# Allegro board pc049a_lemo_db_04.brd
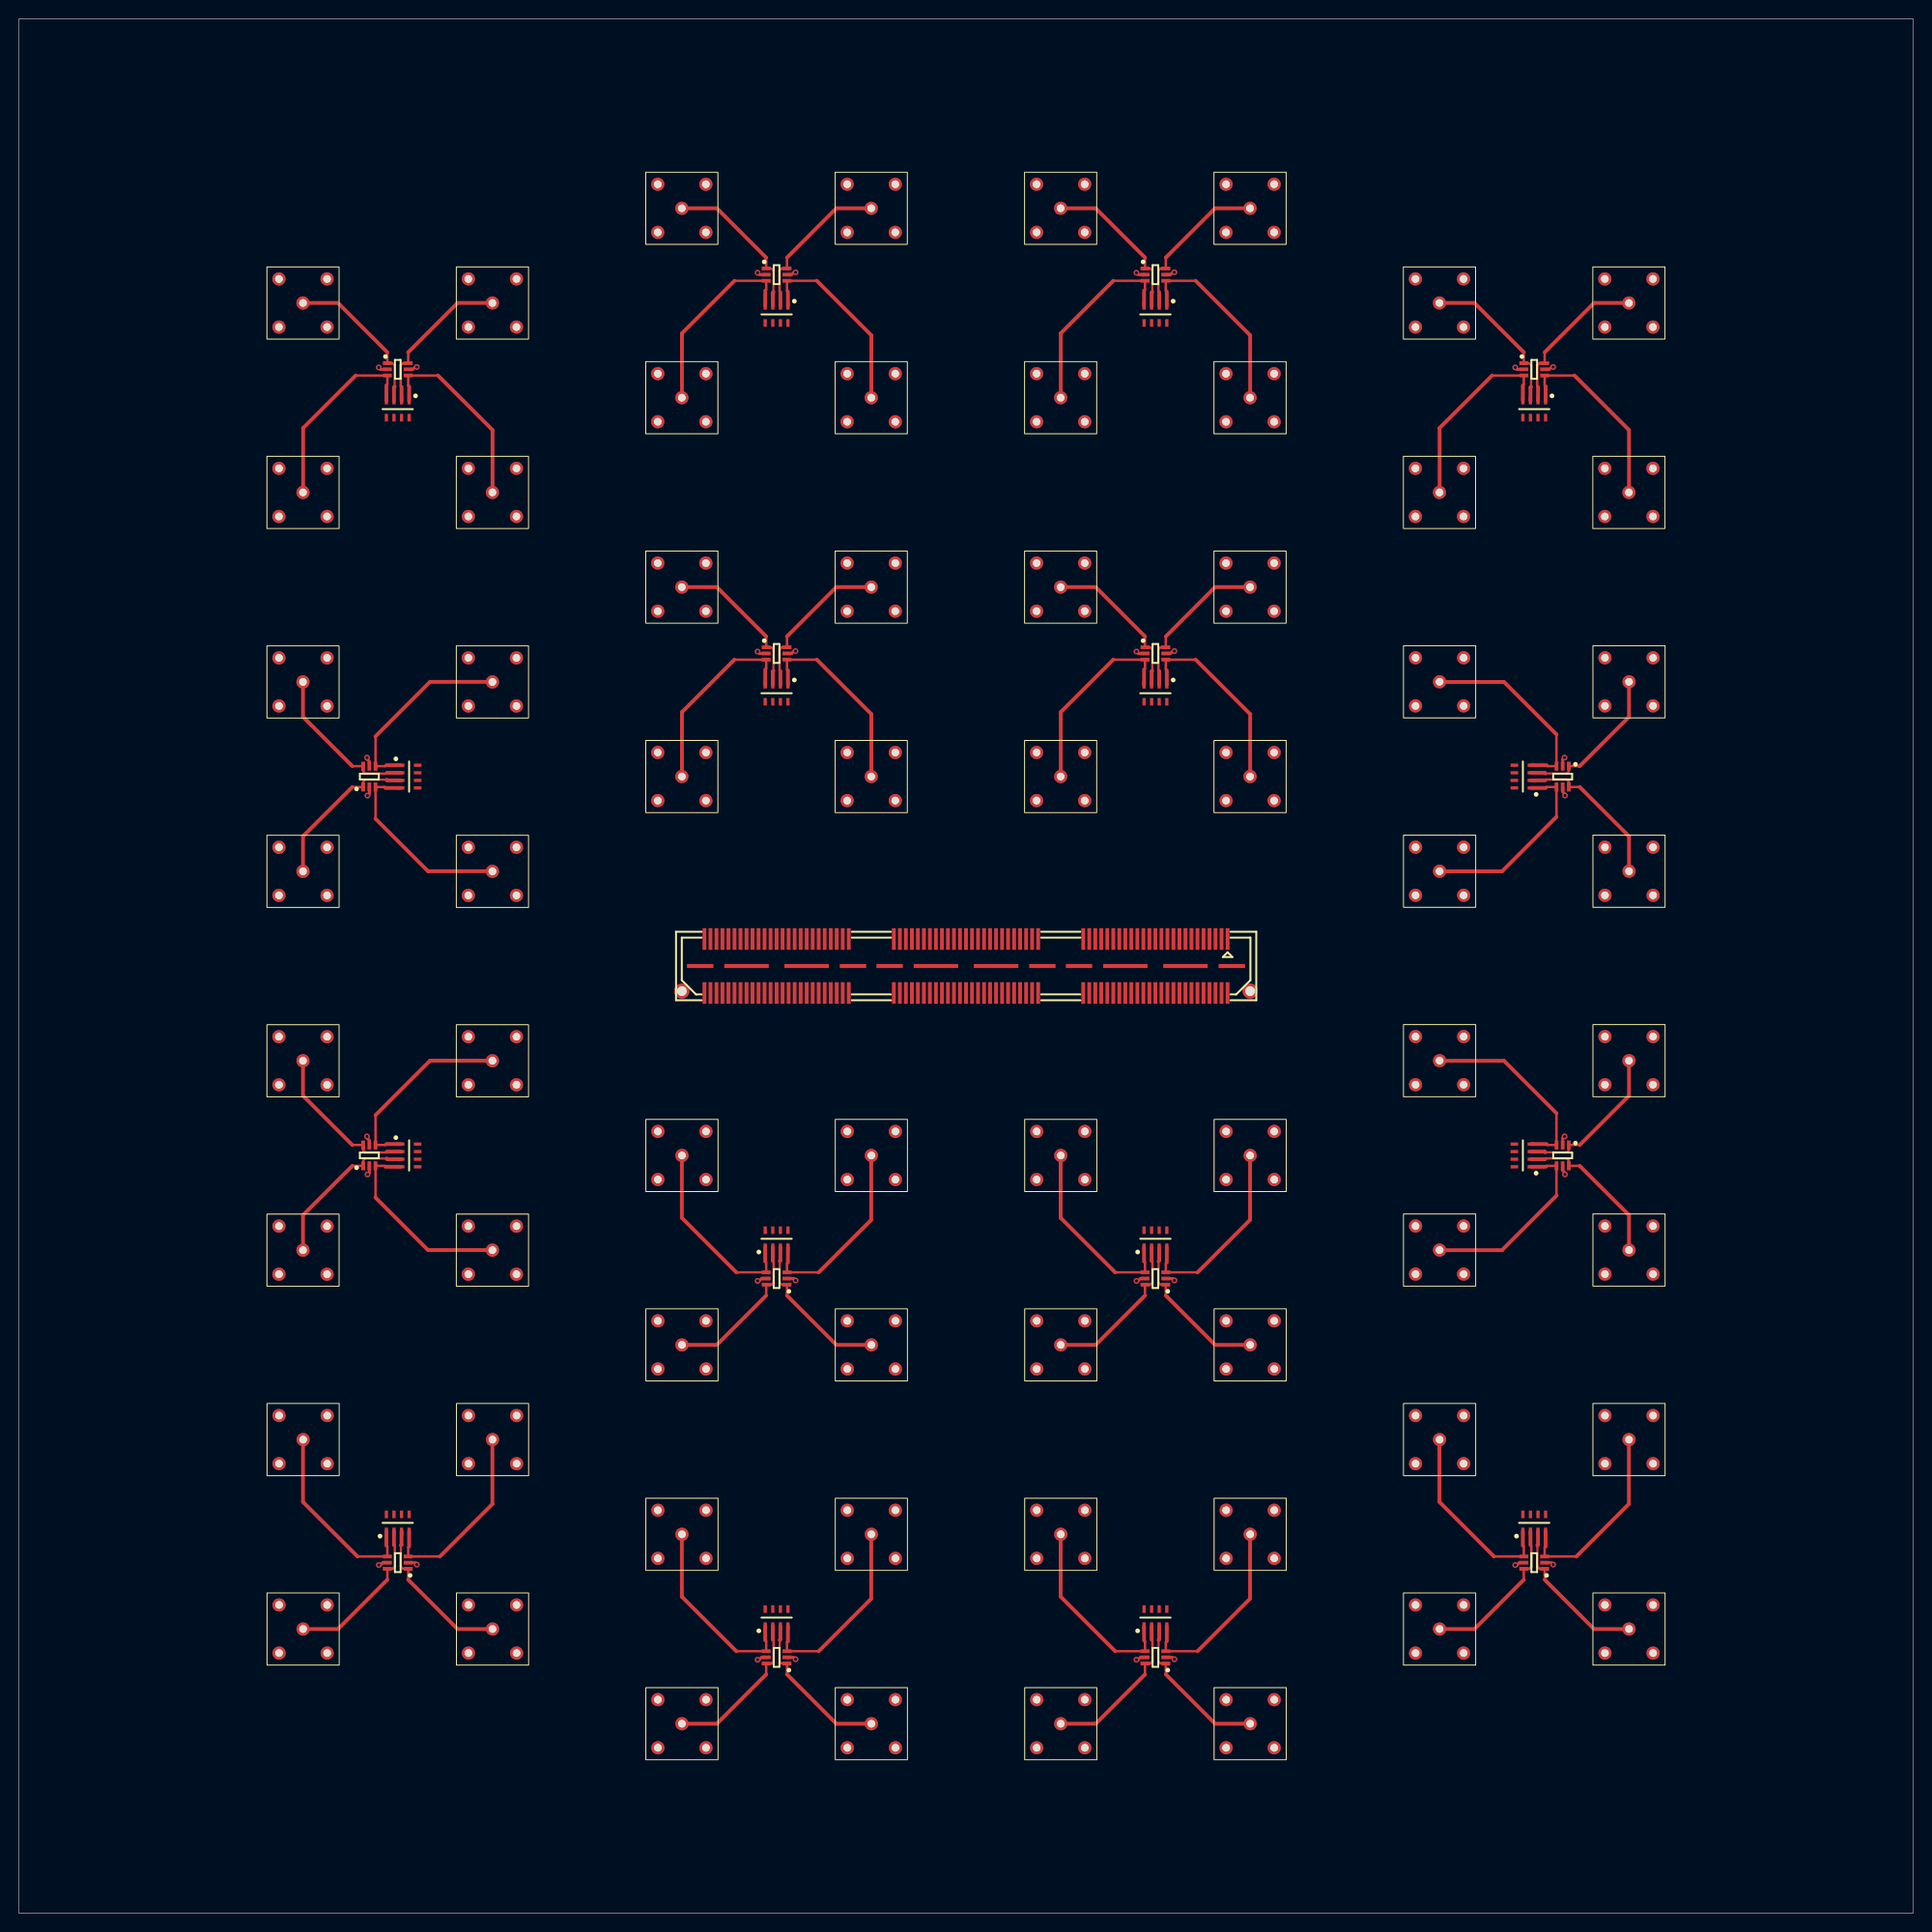
[diagram p0: board, top side]
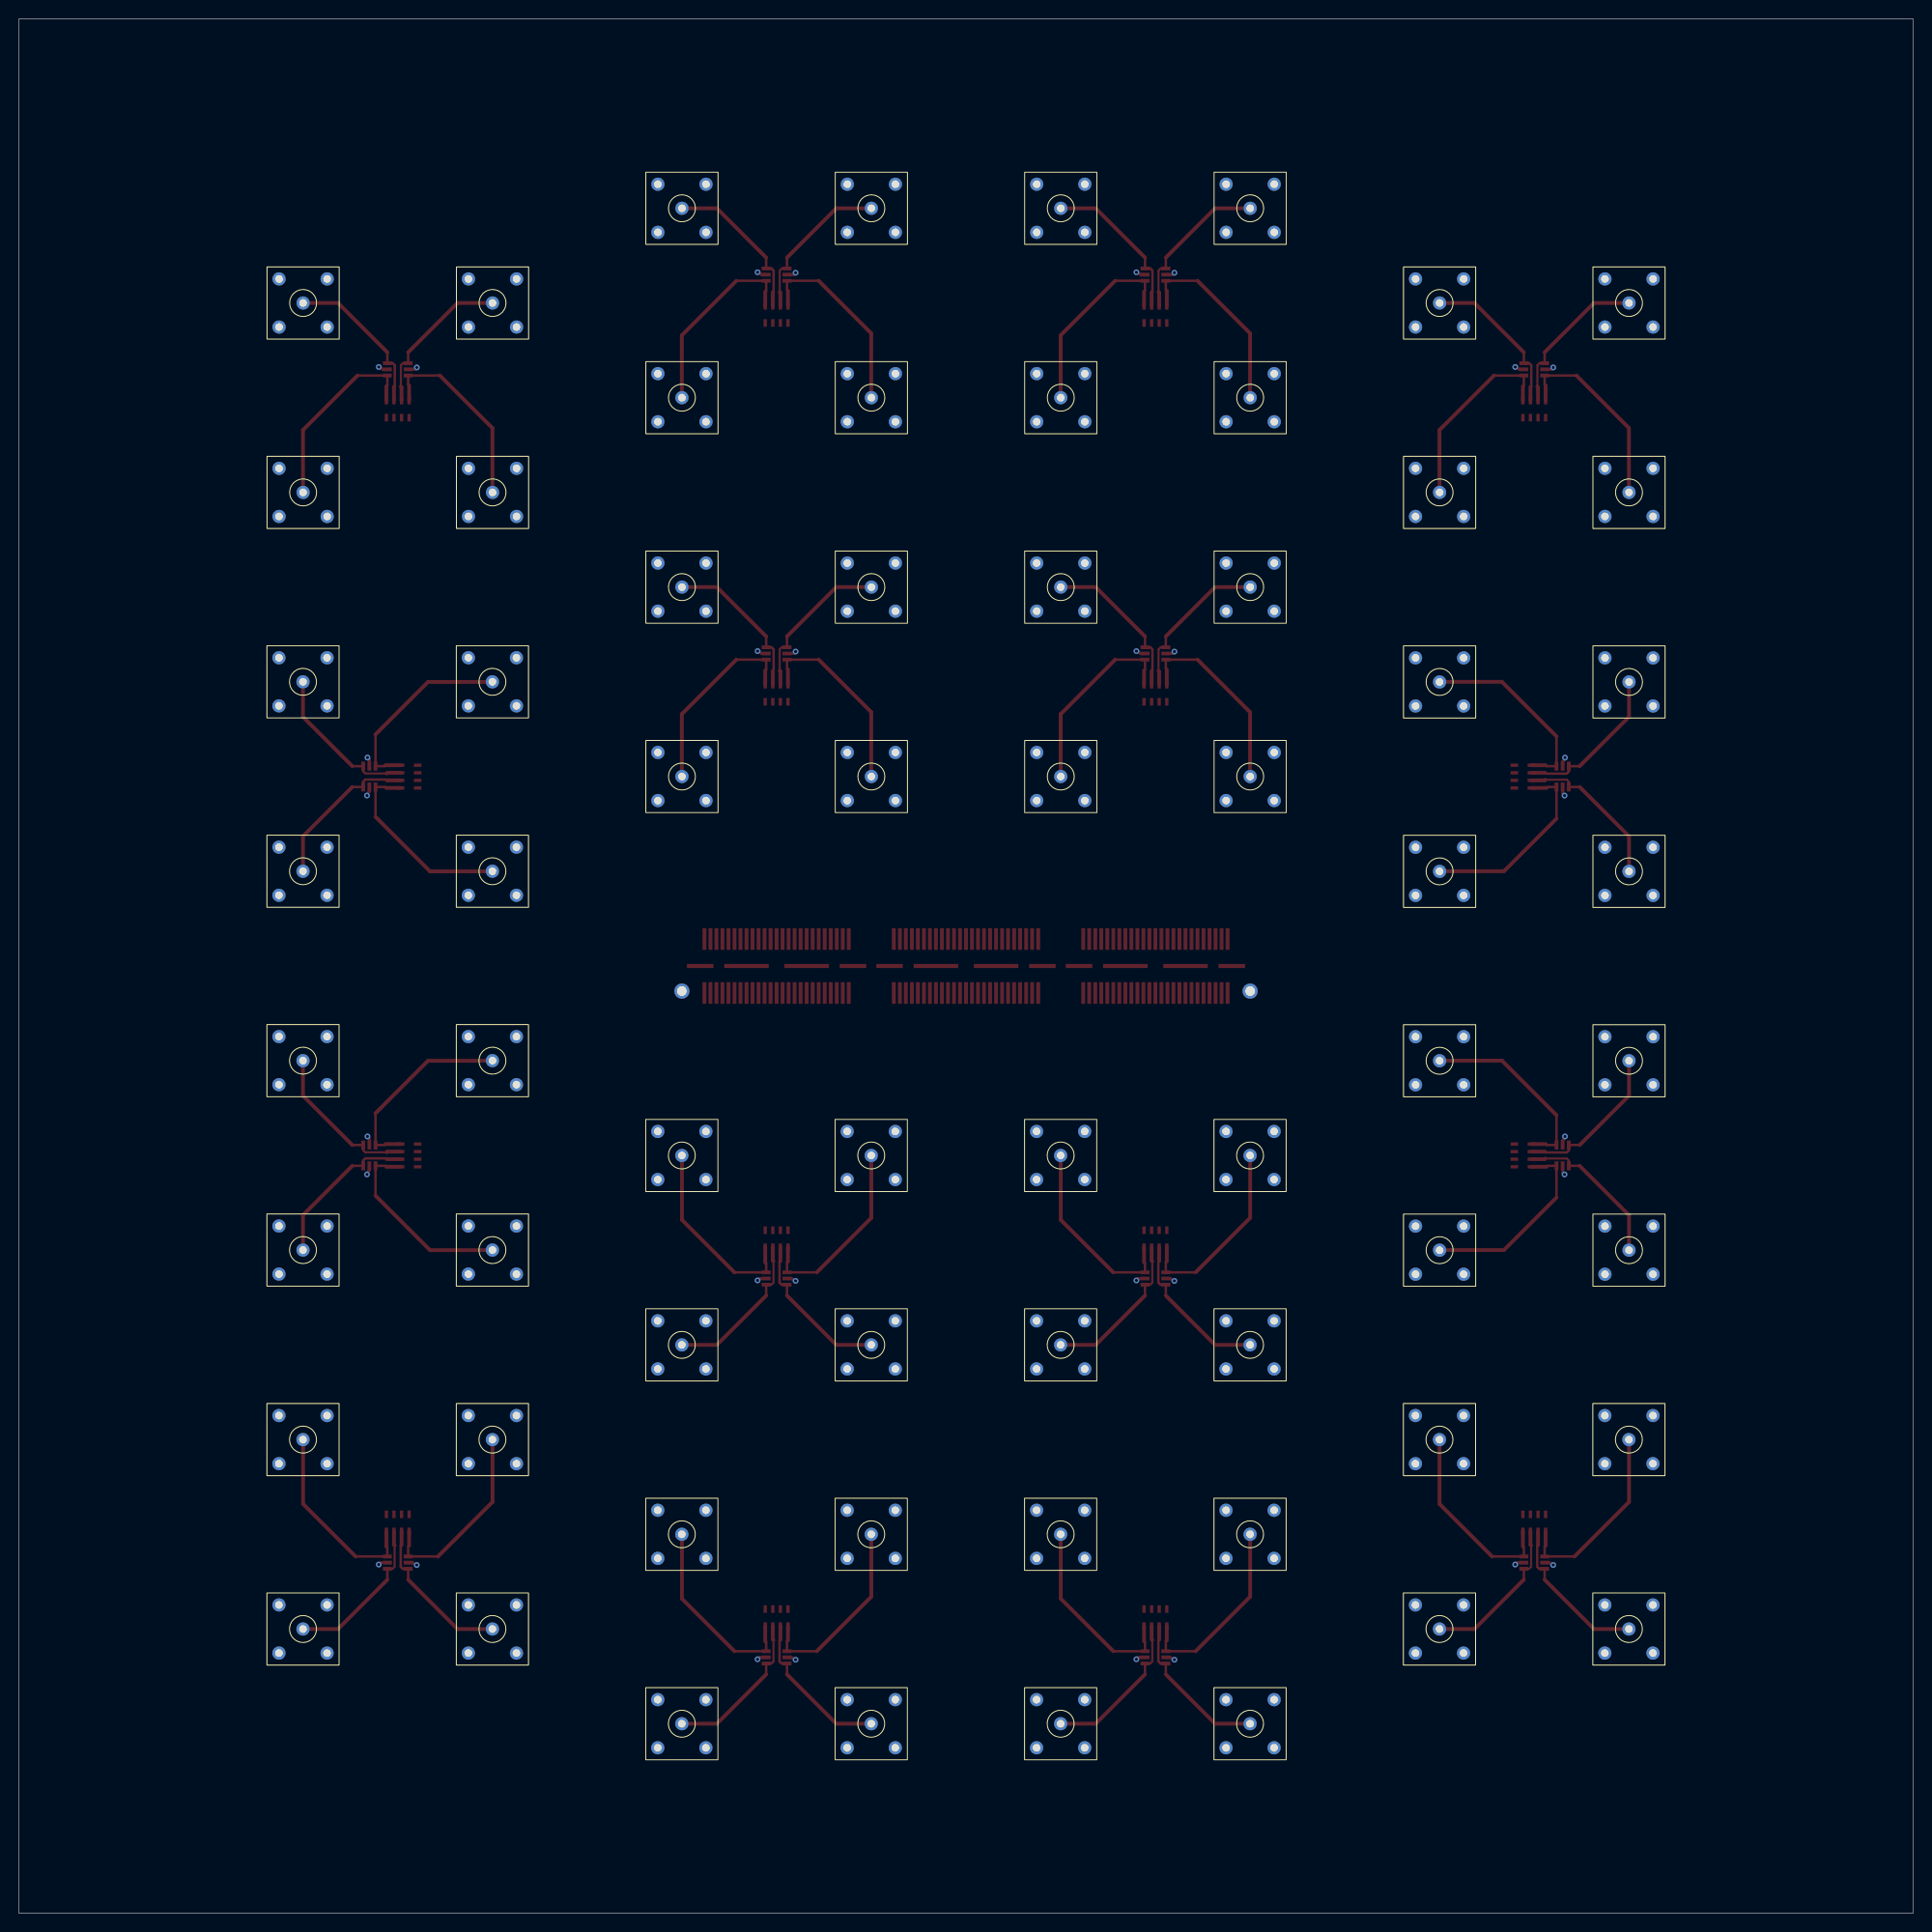
[diagram p1: board, bottom side, seen from below]

Outline 200 x 200 mm; copper layers: TOP, L2, L3, L4, L5, BOTTOM. Coordinates in mm from the lower left corner of the outline.
Outline path: 0,200 200,200 200,0 0,0 0,200

## Design rules (mm)
net group ANALOG_TO_MAROC: nets ANALOG_TO_MAROC<0> ANALOG_TO_MAROC<1> ANALOG_TO_MAROC<2> ANALOG_TO_MAROC<3> ANALOG_TO_MAROC<4> ANALOG_TO_MAROC<5> ANALOG_TO_MAROC<6> ANALOG_TO_MAROC<7> ANALOG_TO_MAROC<8> ANALOG_TO_MAROC<9> ANALOG_TO_MAROC<10> ANALOG_TO_MAROC<11> ANALOG_TO_MAROC<12> ANALOG_TO_MAROC<13> ANALOG_TO_MAROC<14> ANALOG_TO_MAROC<15> ANALOG_TO_MAROC<16> ANALOG_TO_MAROC<17> ANALOG_TO_MAROC<18> ANALOG_TO_MAROC<19> ANALOG_TO_MAROC<20> ANALOG_TO_MAROC<21> ANALOG_TO_MAROC<22> ANALOG_TO_MAROC<23> ANALOG_TO_MAROC<24> ANALOG_TO_MAROC<25> ANALOG_TO_MAROC<26> ANALOG_TO_MAROC<27> ANALOG_TO_MAROC<28> ANALOG_TO_MAROC<29> ANALOG_TO_MAROC<30> ANALOG_TO_MAROC<31> ANALOG_TO_MAROC<32> ANALOG_TO_MAROC<33> ANALOG_TO_MAROC<34> ANALOG_TO_MAROC<35> ANALOG_TO_MAROC<36> ANALOG_TO_MAROC<37> ANALOG_TO_MAROC<38> ANALOG_TO_MAROC<39> ANALOG_TO_MAROC<40> ANALOG_TO_MAROC<41> ANALOG_TO_MAROC<42> ANALOG_TO_MAROC<43> ANALOG_TO_MAROC<44> ANALOG_TO_MAROC<45> ANALOG_TO_MAROC<46> ANALOG_TO_MAROC<47> ANALOG_TO_MAROC<48> ANALOG_TO_MAROC<49> ANALOG_TO_MAROC<50> ANALOG_TO_MAROC<51> ANALOG_TO_MAROC<52> ANALOG_TO_MAROC<53> ANALOG_TO_MAROC<54> ANALOG_TO_MAROC<55> ANALOG_TO_MAROC<56> ANALOG_TO_MAROC<57> ANALOG_TO_MAROC<58> ANALOG_TO_MAROC<59> ANALOG_TO_MAROC<60> ANALOG_TO_MAROC<61> ANALOG_TO_MAROC<62> ANALOG_TO_MAROC<63>

## Placement (name value [footprint] x y rotation side)
CN1_1  100nF/16V  [CAPCAF80P160X320X110-8N]  41.2 80 0 top
CN1_2  100nF/16V  [CAPCAF80P160X320X110-8N]  40 41.2 90 top
CN1_3  100nF/16V  [CAPCAF80P160X320X110-8N]  80 71.2 90 top
CN1_4  100nF/16V  [CAPCAF80P160X320X110-8N]  80 31.2 90 top
CN1_5  100nF/16V  [CAPCAF80P160X320X110-8N]  120 31.2 90 top
CN1_6  100nF/16V  [CAPCAF80P160X320X110-8N]  120 71.2 90 top
CN1_7  100nF/16V  [CAPCAF80P160X320X110-8N]  158.8 80 180 top
CN1_8  100nF/16V  [CAPCAF80P160X320X110-8N]  160 41.2 90 top
CN1_9  100nF/16V  [CAPCAF80P160X320X110-8N]  158.8 120 180 top
CN1_10  100nF/16V  [CAPCAF80P160X320X110-8N]  160 158.8 270 top
CN1_11  100nF/16V  [CAPCAF80P160X320X110-8N]  120 168.8 270 top
CN1_12  100nF/16V  [CAPCAF80P160X320X110-8N]  120 128.8 270 top
CN1_13  100nF/16V  [CAPCAF80P160X320X110-8N]  80 168.8 270 top
CN1_14  100nF/16V  [CAPCAF80P160X320X110-8N]  80 128.8 270 top
CN1_15  100nF/16V  [CAPCAF80P160X320X110-8N]  41.2 120 0 top
CN1_16  100nF/16V  [CAPCAF80P160X320X110-8N]  40 158.8 270 top
D1_1  -  [SOT65P210X110-6N]  37 80 90 top
D1_2  -  [SOT65P210X110-6N]  40 37 180 top
D1_3  -  [SOT65P210X110-6N]  80 67 180 top
D1_4  -  [SOT65P210X110-6N]  80 27 180 top
D1_5  -  [SOT65P210X110-6N]  120 27 180 top
D1_6  -  [SOT65P210X110-6N]  120 67 180 top
D1_7  -  [SOT65P210X110-6N]  163 80 270 top
D1_8  -  [SOT65P210X110-6N]  160 37 180 top
D1_9  -  [SOT65P210X110-6N]  163 120 270 top
D1_10  -  [SOT65P210X110-6N]  160 163 0 top
D1_11  -  [SOT65P210X110-6N]  120 173 0 top
D1_12  -  [SOT65P210X110-6N]  120 133 0 top
D1_13  -  [SOT65P210X110-6N]  80 173 0 top
D1_14  -  [SOT65P210X110-6N]  80 133 0 top
D1_15  -  [SOT65P210X110-6N]  37 120 90 top
D1_16  -  [SOT65P210X110-6N]  40 163 0 top
J1  -  [CON150_QSSDA]  127.62 102.85 270 top
NOREF  -  []  -120 -120 0 top
PX1_1  -  [PLEMOD80]  50 70 270 bottom
PX1_2  -  [PLEMOD80]  50 50 0 bottom
PX1_3  -  [PLEMOD80]  90 80 0 bottom
PX1_4  -  [PLEMOD80]  90 40 0 bottom
PX1_5  -  [PLEMOD80]  130 40 0 bottom
PX1_6  -  [PLEMOD80]  130 80 0 bottom
PX1_7  -  [PLEMOD80]  150 90 90 bottom
PX1_8  -  [PLEMOD80]  170 50 0 bottom
PX1_9  -  [PLEMOD80]  150 130 90 bottom
PX1_10  -  [PLEMOD80]  150 150 180 bottom
PX1_11  -  [PLEMOD80]  110 160 180 bottom
PX1_12  -  [PLEMOD80]  110 120 180 bottom
PX1_13  -  [PLEMOD80]  70 160 180 bottom
PX1_14  -  [PLEMOD80]  70 120 180 bottom
PX1_15  -  [PLEMOD80]  50 110 270 bottom
PX1_16  -  [PLEMOD80]  30 150 180 bottom
PX2_1  -  [PLEMOD80]  30 70 270 bottom
PX2_2  -  [PLEMOD80]  50 30 0 bottom
PX2_3  -  [PLEMOD80]  90 60 0 bottom
PX2_4  -  [PLEMOD80]  90 20 0 bottom
PX2_5  -  [PLEMOD80]  130 20 0 bottom
PX2_6  -  [PLEMOD80]  130 60 0 bottom
PX2_7  -  [PLEMOD80]  170 90 90 bottom
PX2_8  -  [PLEMOD80]  170 30 0 bottom
PX2_9  -  [PLEMOD80]  170 130 90 bottom
PX2_10  -  [PLEMOD80]  150 170 180 bottom
PX2_11  -  [PLEMOD80]  110 180 180 bottom
PX2_12  -  [PLEMOD80]  110 140 180 bottom
PX2_13  -  [PLEMOD80]  70 180 180 bottom
PX2_14  -  [PLEMOD80]  70 140 180 bottom
PX2_15  -  [PLEMOD80]  30 110 270 bottom
PX2_16  -  [PLEMOD80]  30 170 180 bottom
PX3_1  -  [PLEMOD80]  30 90 270 bottom
PX3_2  -  [PLEMOD80]  30 30 0 bottom
PX3_3  -  [PLEMOD80]  70 60 0 bottom
PX3_4  -  [PLEMOD80]  70 20 0 bottom
PX3_5  -  [PLEMOD80]  110 20 0 bottom
PX3_6  -  [PLEMOD80]  110 60 0 bottom
PX3_7  -  [PLEMOD80]  170 70 90 bottom
PX3_8  -  [PLEMOD80]  150 30 0 bottom
PX3_9  -  [PLEMOD80]  170 110 90 bottom
PX3_10  -  [PLEMOD80]  170 170 180 bottom
PX3_11  -  [PLEMOD80]  130 180 180 bottom
PX3_12  -  [PLEMOD80]  130 140 180 bottom
PX3_13  -  [PLEMOD80]  90 180 180 bottom
PX3_14  -  [PLEMOD80]  90 140 180 bottom
PX3_15  -  [PLEMOD80]  30 130 270 bottom
PX3_16  -  [PLEMOD80]  50 170 180 bottom
PX4_1  -  [PLEMOD80]  50 90 270 bottom
PX4_2  -  [PLEMOD80]  30 50 0 bottom
PX4_3  -  [PLEMOD80]  70 80 0 bottom
PX4_4  -  [PLEMOD80]  70 40 0 bottom
PX4_5  -  [PLEMOD80]  110 40 0 bottom
PX4_6  -  [PLEMOD80]  110 80 0 bottom
PX4_7  -  [PLEMOD80]  150 70 90 bottom
PX4_8  -  [PLEMOD80]  150 50 0 bottom
PX4_9  -  [PLEMOD80]  150 110 90 bottom
PX4_10  -  [PLEMOD80]  170 150 180 bottom
PX4_11  -  [PLEMOD80]  130 160 180 bottom
PX4_12  -  [PLEMOD80]  130 120 180 bottom
PX4_13  -  [PLEMOD80]  90 160 180 bottom
PX4_14  -  [PLEMOD80]  90 120 180 bottom
PX4_15  -  [PLEMOD80]  50 130 270 bottom
PX4_16  -  [PLEMOD80]  50 150 180 bottom

## Library data of the parts
CN1_1-CN1_16 = CAPN4I: part number: CAPN4I-100NF,16V,X7R,CKCA43
D1_1-D1_16 = PRTR5V0U4Y
J1 = CON150P: part number: CON150P-QSS75_01FDA
PX1_1-PX1_16 PX2_1-PX2_16 PX3_1-PX3_16 PX4_1-PX4_16 = COAX: part number: COAX-PLEMO00D

## Footprints (pads in the part's own frame, mm; a bottom-side part is the same pattern mirrored in y, then rotated)
CAPCAF80P160X320X110-8N
  rect 0.8x0.35 smd: 1(-0.9,1.2) 2(0.9,1.2) 3(-0.9,0.4) 4(0.9,0.4) 5(-0.9,-0.4) 6(0.9,-0.4) 7(-0.9,-1.2) 8(0.9,-1.2)
CON150_QSSDA
  round 1.6 hole 1.016: (5.5,2.38) (5.5,-57.62)
  rect 2.286x0.406 smd: 1(0,0) 2(5.7,0) 3(0,-0.635) 4(5.7,-0.635) 5(0,-1.27) 6(5.7,-1.27) 7(0,-1.905) 8(5.7,-1.905) 9(0,-2.54) 10(5.7,-2.54) 11(0,-3.175) 12(5.7,-3.175) 13(0,-3.81) 14(5.7,-3.81) 15(0,-4.445) 16(5.7,-4.445) 17(0,-5.08) 18(5.7,-5.08) 19(0,-5.715) 20(5.7,-5.715) 21(0,-6.35) 22(5.7,-6.35) 23(0,-6.985) 24(5.7,-6.985) 25(0,-7.62) 26(5.7,-7.62) 27(0,-8.255) 28(5.7,-8.255) 29(0,-8.89) 30(5.7,-8.89) 31(0,-9.525) 32(5.7,-9.525) 33(0,-10.16) 34(5.7,-10.16) 35(0,-10.795) 36(5.7,-10.795) 37(0,-11.43) 38(5.7,-11.43) 39(0,-12.065) 40(5.7,-12.065) 41(0,-12.7) 42(5.7,-12.7) 43(0,-13.335) 44(5.7,-13.335) 45(0,-13.97) 46(5.7,-13.97) 47(0,-14.605) 48(5.7,-14.605) 49(0,-15.24) 50(5.7,-15.24) 51(0,-20) 52(5.7,-20) 53(0,-20.635) 54(5.7,-20.635) 55(0,-21.27) 56(5.7,-21.27) 57(0,-21.905) 58(5.7,-21.905) 59(0,-22.54) 60(5.7,-22.54) 61(0,-23.175) 62(5.7,-23.175) 63(0,-23.81) 64(5.7,-23.81) 65(0,-24.445) 66(5.7,-24.445) 67(0,-25.08) 68(5.7,-25.08) 69(0,-25.715) 70(5.7,-25.715) 71(0,-26.35) 72(5.7,-26.35) 73(0,-26.985) 74(5.7,-26.985) 75(0,-27.62) 76(5.7,-27.62) 77(0,-28.255) 78(5.7,-28.255) 79(0,-28.89) 80(5.7,-28.89) 81(0,-29.525) 82(5.7,-29.525) 83(0,-30.16) 84(5.7,-30.16) 85(0,-30.795) 86(5.7,-30.795) 87(0,-31.43) 88(5.7,-31.43) 89(0,-32.065) 90(5.7,-32.065) 91(0,-32.7) 92(5.7,-32.7) 93(0,-33.335) 94(5.7,-33.335) 95(0,-33.97) 96(5.7,-33.97) 97(0,-34.605) 98(5.7,-34.605) 99(0,-35.24) 100(5.7,-35.24) 101(0,-40) 102(5.7,-40) 103(0,-40.635) 104(5.7,-40.635) 105(0,-41.27) 106(5.7,-41.27) 107(0,-41.905) 108(5.7,-41.905) 109(0,-42.54) 110(5.7,-42.54) 111(0,-43.175) 112(5.7,-43.175) 113(0,-43.81) 114(5.7,-43.81) 115(0,-44.445) 116(5.7,-44.445) 117(0,-45.08) 118(5.7,-45.08) 119(0,-45.715) 120(5.7,-45.715) 121(0,-46.35) 122(5.7,-46.35) 123(0,-46.985) 124(5.7,-46.985) 125(0,-47.62) 126(5.7,-47.62) 127(0,-48.255) 128(5.7,-48.255) 129(0,-48.89) 130(5.7,-48.89) 131(0,-49.525) 132(5.7,-49.525) 133(0,-50.16) 134(5.7,-50.16) 135(0,-50.795) 136(5.7,-50.795) 137(0,-51.43) 138(5.7,-51.43) 139(0,-52.065) 140(5.7,-52.065) 141(0,-52.7) 142(5.7,-52.7) 143(0,-53.335) 144(5.7,-53.335) 145(0,-53.97) 146(5.7,-53.97) 147(0,-54.605) 148(5.7,-54.605) 149(0,-55.24) 150(5.7,-55.24)
  rect 0.432x2.794 smd: 151(2.85,0.445) 154(2.85,-15.685) 155(2.85,-19.555) 158(2.85,-35.685) 159(2.85,-39.555) 162(2.85,-55.685)
  rect 0.432x4.699 smd: 152(2.85,-4.445) 153(2.85,-10.795) 156(2.85,-24.445) 157(2.85,-30.795) 160(2.85,-44.445) 161(2.85,-50.795)
PLEMOD80
  round 1.397 hole 0.813: 1(0.006,0.007) 2(-2.534,-2.533) 3(2.546,-2.533) 4(2.546,2.547) 5(-2.534,2.547)
SOT65P210X110-6N
  rect 0.95x0.4 smd: 1(-1.1,0.65) 2(-1.1,0) 3(-1.1,-0.65) 4(1.1,-0.65) 5(1.1,0) 6(1.1,0.65)

## Nets
AVDD: J1.147(A<146>) J1.148(A<147>) J1.149(A<148>) J1.150(A<149>)
GND_SIGNAL: D1_1.2(GND) D1_1.5(VCC) D1_2.2(GND) D1_2.5(VCC) D1_3.2(GND) D1_3.5(VCC) D1_4.2(GND) D1_4.5(VCC) D1_5.2(GND) D1_5.5(VCC) D1_6.2(GND) D1_6.5(VCC) D1_7.2(GND) D1_7.5(VCC) D1_8.2(GND) D1_8.5(VCC) D1_9.2(GND) D1_9.5(VCC) D1_10.2(GND) D1_10.5(VCC) D1_11.2(GND) D1_11.5(VCC) D1_12.2(GND) D1_12.5(VCC) D1_13.2(GND) D1_13.5(VCC) D1_14.2(GND) D1_14.5(VCC) D1_15.2(GND) D1_15.5(VCC) D1_16.2(GND) D1_16.5(VCC) J1.1(A<0>) J1.4(A<3>) J1.5(A<4>) J1.8(A<7>) J1.9(A<8>) J1.12(A<11>) J1.13(A<12>) J1.16(A<15>) J1.17(A<16>) J1.20(A<19>) J1.21(A<20>) J1.24(A<23>) J1.25(A<24>) J1.28(A<27>) J1.29(A<28>) J1.32(A<31>) J1.33(A<32>) J1.36(A<35>) J1.37(A<36>) J1.40(A<39>) J1.41(A<40>) J1.44(A<43>) J1.45(A<44>) J1.48(A<47>) J1.49(A<48>) J1.52(A<51>) J1.53(A<52>) J1.56(A<55>) J1.57(A<56>) J1.60(A<59>) J1.61(A<60>) J1.64(A<63>) J1.65(A<64>) J1.68(A<67>) J1.69(A<68>) J1.72(A<71>) J1.73(A<72>) J1.76(A<75>) J1.77(A<76>) J1.80(A<79>) J1.81(A<80>) J1.84(A<83>) J1.85(A<84>) J1.88(A<87>) J1.89(A<88>) J1.92(A<91>) J1.93(A<92>) J1.96(A<95>) J1.97(A<96>) J1.100(A<99>) J1.101(A<100>) J1.104(A<103>) J1.105(A<104>) J1.108(A<107>) J1.109(A<108>) J1.112(A<111>) J1.113(A<112>) J1.116(A<115>) J1.117(A<116>) J1.120(A<119>) J1.121(A<120>) J1.124(A<123>) J1.125(A<124>) J1.128(A<127>) J1.129(A<128>) J1.132(A<131>) J1.133(A<132>) J1.136(A<135>) J1.137(A<136>) J1.140(A<139>) J1.141(A<140>) J1.144(A<143>) J1.145(A<144>) J1.146(A<145>) PX1_1.2(B<0>) PX1_1.3(B<1>) PX1_1.4(B<2>) PX1_1.5(B<3>) PX1_2.2(B<0>) PX1_2.3(B<1>) PX1_2.4(B<2>) PX1_2.5(B<3>) PX1_3.2(B<0>) PX1_3.3(B<1>) PX1_3.4(B<2>) PX1_3.5(B<3>) PX1_4.2(B<0>) PX1_4.3(B<1>) PX1_4.4(B<2>) PX1_4.5(B<3>) PX1_5.2(B<0>) PX1_5.3(B<1>) PX1_5.4(B<2>) PX1_5.5(B<3>) PX1_6.2(B<0>) PX1_6.3(B<1>) PX1_6.4(B<2>) PX1_6.5(B<3>) PX1_7.2(B<0>) PX1_7.3(B<1>) PX1_7.4(B<2>) PX1_7.5(B<3>) PX1_8.2(B<0>) PX1_8.3(B<1>) PX1_8.4(B<2>) PX1_8.5(B<3>) PX1_9.2(B<0>) PX1_9.3(B<1>) PX1_9.4(B<2>) PX1_9.5(B<3>) PX1_10.2(B<0>) PX1_10.3(B<1>) PX1_10.4(B<2>) PX1_10.5(B<3>) PX1_11.2(B<0>) PX1_11.3(B<1>) PX1_11.4(B<2>) PX1_11.5(B<3>) PX1_12.2(B<0>) PX1_12.3(B<1>) PX1_12.4(B<2>) PX1_12.5(B<3>) PX1_13.2(B<0>) PX1_13.3(B<1>) PX1_13.4(B<2>) PX1_13.5(B<3>) PX1_14.2(B<0>) PX1_14.3(B<1>) PX1_14.4(B<2>) PX1_14.5(B<3>) PX1_15.2(B<0>) PX1_15.3(B<1>) PX1_15.4(B<2>) PX1_15.5(B<3>) PX1_16.2(B<0>) PX1_16.3(B<1>) PX1_16.4(B<2>) PX1_16.5(B<3>) PX2_1.2(B<0>) PX2_1.3(B<1>) PX2_1.4(B<2>) PX2_1.5(B<3>) PX2_2.2(B<0>) PX2_2.3(B<1>) PX2_2.4(B<2>) PX2_2.5(B<3>) PX2_3.2(B<0>) PX2_3.3(B<1>) PX2_3.4(B<2>) PX2_3.5(B<3>) PX2_4.2(B<0>) PX2_4.3(B<1>) PX2_4.4(B<2>) PX2_4.5(B<3>) PX2_5.2(B<0>) PX2_5.3(B<1>) PX2_5.4(B<2>) PX2_5.5(B<3>) PX2_6.2(B<0>) PX2_6.3(B<1>) PX2_6.4(B<2>) PX2_6.5(B<3>) PX2_7.2(B<0>) PX2_7.3(B<1>) PX2_7.4(B<2>) PX2_7.5(B<3>) PX2_8.2(B<0>) PX2_8.3(B<1>) PX2_8.4(B<2>) PX2_8.5(B<3>) PX2_9.2(B<0>) PX2_9.3(B<1>) PX2_9.4(B<2>) PX2_9.5(B<3>) PX2_10.2(B<0>) PX2_10.3(B<1>) PX2_10.4(B<2>) PX2_10.5(B<3>) PX2_11.2(B<0>) PX2_11.3(B<1>) PX2_11.4(B<2>) PX2_11.5(B<3>) PX2_12.2(B<0>) PX2_12.3(B<1>) PX2_12.4(B<2>) PX2_12.5(B<3>) PX2_13.2(B<0>) PX2_13.3(B<1>) PX2_13.4(B<2>) PX2_13.5(B<3>) PX2_14.2(B<0>) PX2_14.3(B<1>) PX2_14.4(B<2>) PX2_14.5(B<3>) PX2_15.2(B<0>) PX2_15.3(B<1>) PX2_15.4(B<2>) PX2_15.5(B<3>) PX2_16.2(B<0>) PX2_16.3(B<1>) PX2_16.4(B<2>) PX2_16.5(B<3>) PX3_1.2(B<0>) PX3_1.3(B<1>) PX3_1.4(B<2>) PX3_1.5(B<3>) PX3_2.2(B<0>) PX3_2.3(B<1>) PX3_2.4(B<2>) PX3_2.5(B<3>) PX3_3.2(B<0>) PX3_3.3(B<1>) PX3_3.4(B<2>) PX3_3.5(B<3>) PX3_4.2(B<0>) PX3_4.3(B<1>) PX3_4.4(B<2>) PX3_4.5(B<3>) PX3_5.2(B<0>) PX3_5.3(B<1>) PX3_5.4(B<2>) PX3_5.5(B<3>) PX3_6.2(B<0>) PX3_6.3(B<1>) PX3_6.4(B<2>) PX3_6.5(B<3>) PX3_7.2(B<0>) PX3_7.3(B<1>) PX3_7.4(B<2>) PX3_7.5(B<3>) PX3_8.2(B<0>) PX3_8.3(B<1>) PX3_8.4(B<2>) PX3_8.5(B<3>) PX3_9.2(B<0>) PX3_9.3(B<1>) PX3_9.4(B<2>) PX3_9.5(B<3>) PX3_10.2(B<0>) PX3_10.3(B<1>) PX3_10.4(B<2>) PX3_10.5(B<3>) PX3_11.2(B<0>) PX3_11.3(B<1>) PX3_11.4(B<2>) PX3_11.5(B<3>) PX3_12.2(B<0>) PX3_12.3(B<1>) PX3_12.4(B<2>) PX3_12.5(B<3>) PX3_13.2(B<0>) PX3_13.3(B<1>) PX3_13.4(B<2>) PX3_13.5(B<3>) PX3_14.2(B<0>) PX3_14.3(B<1>) PX3_14.4(B<2>) PX3_14.5(B<3>) PX3_15.2(B<0>) PX3_15.3(B<1>) PX3_15.4(B<2>) PX3_15.5(B<3>) PX3_16.2(B<0>) PX3_16.3(B<1>) PX3_16.4(B<2>) PX3_16.5(B<3>) PX4_1.2(B<0>) PX4_1.3(B<1>) PX4_1.4(B<2>) PX4_1.5(B<3>) PX4_2.2(B<0>) PX4_2.3(B<1>) PX4_2.4(B<2>) PX4_2.5(B<3>) PX4_3.2(B<0>) PX4_3.3(B<1>) PX4_3.4(B<2>) PX4_3.5(B<3>) PX4_4.2(B<0>) PX4_4.3(B<1>) PX4_4.4(B<2>) PX4_4.5(B<3>) PX4_5.2(B<0>) PX4_5.3(B<1>) PX4_5.4(B<2>) PX4_5.5(B<3>) PX4_6.2(B<0>) PX4_6.3(B<1>) PX4_6.4(B<2>) PX4_6.5(B<3>) PX4_7.2(B<0>) PX4_7.3(B<1>) PX4_7.4(B<2>) PX4_7.5(B<3>) PX4_8.2(B<0>) PX4_8.3(B<1>) PX4_8.4(B<2>) PX4_8.5(B<3>) PX4_9.2(B<0>) PX4_9.3(B<1>) PX4_9.4(B<2>) PX4_9.5(B<3>) PX4_10.2(B<0>) PX4_10.3(B<1>) PX4_10.4(B<2>) PX4_10.5(B<3>) PX4_11.2(B<0>) PX4_11.3(B<1>) PX4_11.4(B<2>) PX4_11.5(B<3>) PX4_12.2(B<0>) PX4_12.3(B<1>) PX4_12.4(B<2>) PX4_12.5(B<3>) PX4_13.2(B<0>) PX4_13.3(B<1>) PX4_13.4(B<2>) PX4_13.5(B<3>) PX4_14.2(B<0>) PX4_14.3(B<1>) PX4_14.4(B<2>) PX4_14.5(B<3>) PX4_15.2(B<0>) PX4_15.3(B<1>) PX4_15.4(B<2>) PX4_15.5(B<3>) PX4_16.2(B<0>) PX4_16.3(B<1>) PX4_16.4(B<2>) PX4_16.5(B<3>)
ANALOG_TO_MAROC<0>: CN1_7.8(B<0>) J1.2(A<1>)
ANALOG_TO_MAROC<1>: CN1_9.2(B<0>) J1.3(A<2>)
ANALOG_TO_MAROC<2>: CN1_7.6(B<0>) J1.6(A<5>)
ANALOG_TO_MAROC<3>: CN1_9.4(B<0>) J1.7(A<6>)
ANALOG_TO_MAROC<4>: CN1_7.4(B<0>) J1.10(A<9>)
ANALOG_TO_MAROC<5>: CN1_9.6(B<0>) J1.11(A<10>)
ANALOG_TO_MAROC<6>: CN1_7.2(B<0>) J1.14(A<13>)
ANALOG_TO_MAROC<7>: CN1_9.8(B<0>) J1.15(A<14>)
ANALOG_TO_MAROC<8>: CN1_8.8(B<0>) J1.18(A<17>)
ANALOG_TO_MAROC<9>: CN1_10.2(B<0>) J1.19(A<18>)
ANALOG_TO_MAROC<10>: CN1_8.6(B<0>) J1.22(A<21>)
ANALOG_TO_MAROC<11>: CN1_10.4(B<0>) J1.23(A<22>)
ANALOG_TO_MAROC<12>: CN1_8.4(B<0>) J1.26(A<25>)
ANALOG_TO_MAROC<13>: CN1_10.6(B<0>) J1.27(A<26>)
ANALOG_TO_MAROC<14>: CN1_8.2(B<0>) J1.30(A<29>)
ANALOG_TO_MAROC<15>: CN1_10.8(B<0>) J1.31(A<30>)
ANALOG_TO_MAROC<16>: CN1_6.8(B<0>) J1.34(A<33>)
ANALOG_TO_MAROC<17>: CN1_12.2(B<0>) J1.35(A<34>)
ANALOG_TO_MAROC<18>: CN1_6.6(B<0>) J1.38(A<37>)
ANALOG_TO_MAROC<19>: CN1_12.4(B<0>) J1.39(A<38>)
ANALOG_TO_MAROC<20>: CN1_6.4(B<0>) J1.42(A<41>)
ANALOG_TO_MAROC<21>: CN1_12.6(B<0>) J1.43(A<42>)
ANALOG_TO_MAROC<22>: CN1_6.2(B<0>) J1.46(A<45>)
ANALOG_TO_MAROC<23>: CN1_12.8(B<0>) J1.47(A<46>)
ANALOG_TO_MAROC<24>: CN1_5.8(B<0>) J1.50(A<49>)
ANALOG_TO_MAROC<25>: CN1_11.2(B<0>) J1.51(A<50>)
ANALOG_TO_MAROC<26>: CN1_5.6(B<0>) J1.54(A<53>)
ANALOG_TO_MAROC<27>: CN1_11.4(B<0>) J1.55(A<54>)
ANALOG_TO_MAROC<28>: CN1_5.4(B<0>) J1.58(A<57>)
ANALOG_TO_MAROC<29>: CN1_11.6(B<0>) J1.59(A<58>)
ANALOG_TO_MAROC<30>: CN1_5.2(B<0>) J1.62(A<61>)
ANALOG_TO_MAROC<31>: CN1_11.8(B<0>) J1.63(A<62>)
ANALOG_TO_MAROC<32>: CN1_4.8(B<0>) J1.66(A<65>)
ANALOG_TO_MAROC<33>: CN1_13.2(B<0>) J1.67(A<66>)
ANALOG_TO_MAROC<34>: CN1_4.6(B<0>) J1.70(A<69>)
ANALOG_TO_MAROC<35>: CN1_13.4(B<0>) J1.71(A<70>)
ANALOG_TO_MAROC<36>: CN1_4.4(B<0>) J1.74(A<73>)
ANALOG_TO_MAROC<37>: CN1_13.6(B<0>) J1.75(A<74>)
ANALOG_TO_MAROC<38>: CN1_4.2(B<0>) J1.78(A<77>)
ANALOG_TO_MAROC<39>: CN1_13.8(B<0>) J1.79(A<78>)
ANALOG_TO_MAROC<40>: CN1_3.8(B<0>) J1.82(A<81>)
ANALOG_TO_MAROC<41>: CN1_14.2(B<0>) J1.83(A<82>)
ANALOG_TO_MAROC<42>: CN1_3.6(B<0>) J1.86(A<85>)
ANALOG_TO_MAROC<43>: CN1_14.4(B<0>) J1.87(A<86>)
ANALOG_TO_MAROC<44>: CN1_3.4(B<0>) J1.90(A<89>)
ANALOG_TO_MAROC<45>: CN1_14.6(B<0>) J1.91(A<90>)
ANALOG_TO_MAROC<46>: CN1_3.2(B<0>) J1.94(A<93>)
ANALOG_TO_MAROC<47>: CN1_14.8(B<0>) J1.95(A<94>)
ANALOG_TO_MAROC<48>: CN1_2.8(B<0>) J1.98(A<97>)
ANALOG_TO_MAROC<49>: CN1_16.2(B<0>) J1.99(A<98>)
ANALOG_TO_MAROC<50>: CN1_2.6(B<0>) J1.102(A<101>)
ANALOG_TO_MAROC<51>: CN1_16.4(B<0>) J1.103(A<102>)
ANALOG_TO_MAROC<52>: CN1_2.4(B<0>) J1.106(A<105>)
ANALOG_TO_MAROC<53>: CN1_16.6(B<0>) J1.107(A<106>)
ANALOG_TO_MAROC<54>: CN1_2.2(B<0>) J1.110(A<109>)
ANALOG_TO_MAROC<55>: CN1_16.8(B<0>) J1.111(A<110>)
ANALOG_TO_MAROC<56>: CN1_1.8(B<0>) J1.114(A<113>)
ANALOG_TO_MAROC<57>: CN1_15.2(B<0>) J1.115(A<114>)
ANALOG_TO_MAROC<58>: CN1_1.6(B<0>) J1.118(A<117>)
ANALOG_TO_MAROC<59>: CN1_15.4(B<0>) J1.119(A<118>)
ANALOG_TO_MAROC<60>: CN1_1.4(B<0>) J1.122(A<121>)
ANALOG_TO_MAROC<61>: CN1_15.6(B<0>) J1.123(A<122>)
ANALOG_TO_MAROC<62>: CN1_1.2(B<0>) J1.126(A<125>)
ANALOG_TO_MAROC<63>: CN1_15.8(B<0>) J1.127(A<126>)
DBOARD_MISO: J1.131(A<130>)
DBOARD_MISO*: J1.135(A<134>)
DBOARD_MOSI: J1.138(A<137>)
DBOARD_MOSI*: J1.142(A<141>)
DBOARD_SCLK: J1.130(A<129>)
DBOARD_SCLK*: J1.134(A<133>)
DBOARD_SSN: J1.139(A<138>)
DBOARD_SSN*: J1.143(A<142>)
P1: J1.151 J1.152 J1.153 J1.154
P2: J1.155 J1.156 J1.157 J1.158
P3: J1.159 J1.160 J1.161 J1.162
UNNAMED_1_CAPN4I_I10_A_1: CN1_1.1(A<0>) D1_1.4(ESD3) PX4_1.1(A)
UNNAMED_1_CAPN4I_I10_A_1_1: CN1_1.3(A<0>) D1_1.6(ESD4) PX3_1.1(A)
UNNAMED_1_CAPN4I_I10_A_1_2: CN1_2.3(A<0>) D1_2.6(ESD4) PX3_2.1(A)
UNNAMED_1_CAPN4I_I10_A_1_3: CN1_3.3(A<0>) D1_3.6(ESD4) PX3_3.1(A)
UNNAMED_1_CAPN4I_I10_A_1_4: CN1_4.3(A<0>) D1_4.6(ESD4) PX3_4.1(A)
UNNAMED_1_CAPN4I_I10_A_1_5: CN1_5.3(A<0>) D1_5.6(ESD4) PX3_5.1(A)
UNNAMED_1_CAPN4I_I10_A_1_6: CN1_6.3(A<0>) D1_6.6(ESD4) PX3_6.1(A)
UNNAMED_1_CAPN4I_I10_A_1_7: CN1_7.3(A<0>) D1_7.6(ESD4) PX3_7.1(A)
UNNAMED_1_CAPN4I_I10_A_1_8: CN1_8.3(A<0>) D1_8.6(ESD4) PX3_8.1(A)
UNNAMED_1_CAPN4I_I10_A_1_9: CN1_9.3(A<0>) D1_9.6(ESD4) PX3_9.1(A)
UNNAMED_1_CAPN4I_I10_A_1_10: CN1_10.3(A<0>) D1_10.6(ESD4) PX3_10.1(A)
UNNAMED_1_CAPN4I_I10_A_1_11: CN1_11.3(A<0>) D1_11.6(ESD4) PX3_11.1(A)
UNNAMED_1_CAPN4I_I10_A_1_12: CN1_12.3(A<0>) D1_12.6(ESD4) PX3_12.1(A)
UNNAMED_1_CAPN4I_I10_A_1_13: CN1_13.3(A<0>) D1_13.6(ESD4) PX3_13.1(A)
UNNAMED_1_CAPN4I_I10_A_1_14: CN1_14.3(A<0>) D1_14.6(ESD4) PX3_14.1(A)
UNNAMED_1_CAPN4I_I10_A_1_15: CN1_15.3(A<0>) D1_15.6(ESD4) PX3_15.1(A)
UNNAMED_1_CAPN4I_I10_A_1_16: CN1_16.3(A<0>) D1_16.6(ESD4) PX3_16.1(A)
UNNAMED_1_CAPN4I_I10_A_2: CN1_2.1(A<0>) D1_2.4(ESD3) PX4_2.1(A)
UNNAMED_1_CAPN4I_I10_A_2_1: CN1_1.5(A<0>) D1_1.1(ESD1) PX2_1.1(A)
UNNAMED_1_CAPN4I_I10_A_2_2: CN1_2.5(A<0>) D1_2.1(ESD1) PX2_2.1(A)
UNNAMED_1_CAPN4I_I10_A_2_3: CN1_3.5(A<0>) D1_3.1(ESD1) PX2_3.1(A)
UNNAMED_1_CAPN4I_I10_A_2_4: CN1_4.5(A<0>) D1_4.1(ESD1) PX2_4.1(A)
UNNAMED_1_CAPN4I_I10_A_2_5: CN1_5.5(A<0>) D1_5.1(ESD1) PX2_5.1(A)
UNNAMED_1_CAPN4I_I10_A_2_6: CN1_6.5(A<0>) D1_6.1(ESD1) PX2_6.1(A)
UNNAMED_1_CAPN4I_I10_A_2_7: CN1_7.5(A<0>) D1_7.1(ESD1) PX2_7.1(A)
UNNAMED_1_CAPN4I_I10_A_2_8: CN1_8.5(A<0>) D1_8.1(ESD1) PX2_8.1(A)
UNNAMED_1_CAPN4I_I10_A_2_9: CN1_9.5(A<0>) D1_9.1(ESD1) PX2_9.1(A)
UNNAMED_1_CAPN4I_I10_A_2_10: CN1_10.5(A<0>) D1_10.1(ESD1) PX2_10.1(A)
UNNAMED_1_CAPN4I_I10_A_2_11: CN1_11.5(A<0>) D1_11.1(ESD1) PX2_11.1(A)
UNNAMED_1_CAPN4I_I10_A_2_12: CN1_12.5(A<0>) D1_12.1(ESD1) PX2_12.1(A)
UNNAMED_1_CAPN4I_I10_A_2_13: CN1_13.5(A<0>) D1_13.1(ESD1) PX2_13.1(A)
UNNAMED_1_CAPN4I_I10_A_2_14: CN1_14.5(A<0>) D1_14.1(ESD1) PX2_14.1(A)
UNNAMED_1_CAPN4I_I10_A_2_15: CN1_15.5(A<0>) D1_15.1(ESD1) PX2_15.1(A)
UNNAMED_1_CAPN4I_I10_A_2_16: CN1_16.5(A<0>) D1_16.1(ESD1) PX2_16.1(A)
UNNAMED_1_CAPN4I_I10_A_3: CN1_3.1(A<0>) D1_3.4(ESD3) PX4_3.1(A)
UNNAMED_1_CAPN4I_I10_A_3_1: CN1_1.7(A<0>) D1_1.3(ESD2) PX1_1.1(A)
UNNAMED_1_CAPN4I_I10_A_3_2: CN1_2.7(A<0>) D1_2.3(ESD2) PX1_2.1(A)
UNNAMED_1_CAPN4I_I10_A_3_3: CN1_3.7(A<0>) D1_3.3(ESD2) PX1_3.1(A)
UNNAMED_1_CAPN4I_I10_A_3_4: CN1_4.7(A<0>) D1_4.3(ESD2) PX1_4.1(A)
UNNAMED_1_CAPN4I_I10_A_3_5: CN1_5.7(A<0>) D1_5.3(ESD2) PX1_5.1(A)
UNNAMED_1_CAPN4I_I10_A_3_6: CN1_6.7(A<0>) D1_6.3(ESD2) PX1_6.1(A)
UNNAMED_1_CAPN4I_I10_A_3_7: CN1_7.7(A<0>) D1_7.3(ESD2) PX1_7.1(A)
UNNAMED_1_CAPN4I_I10_A_3_8: CN1_8.7(A<0>) D1_8.3(ESD2) PX1_8.1(A)
UNNAMED_1_CAPN4I_I10_A_3_9: CN1_9.7(A<0>) D1_9.3(ESD2) PX1_9.1(A)
UNNAMED_1_CAPN4I_I10_A_3_10: CN1_10.7(A<0>) D1_10.3(ESD2) PX1_10.1(A)
UNNAMED_1_CAPN4I_I10_A_3_11: CN1_11.7(A<0>) D1_11.3(ESD2) PX1_11.1(A)
UNNAMED_1_CAPN4I_I10_A_3_12: CN1_12.7(A<0>) D1_12.3(ESD2) PX1_12.1(A)
UNNAMED_1_CAPN4I_I10_A_3_13: CN1_13.7(A<0>) D1_13.3(ESD2) PX1_13.1(A)
UNNAMED_1_CAPN4I_I10_A_3_14: CN1_14.7(A<0>) D1_14.3(ESD2) PX1_14.1(A)
UNNAMED_1_CAPN4I_I10_A_3_15: CN1_15.7(A<0>) D1_15.3(ESD2) PX1_15.1(A)
UNNAMED_1_CAPN4I_I10_A_3_16: CN1_16.7(A<0>) D1_16.3(ESD2) PX1_16.1(A)
UNNAMED_1_CAPN4I_I10_A_4: CN1_4.1(A<0>) D1_4.4(ESD3) PX4_4.1(A)
UNNAMED_1_CAPN4I_I10_A_5: CN1_5.1(A<0>) D1_5.4(ESD3) PX4_5.1(A)
UNNAMED_1_CAPN4I_I10_A_6: CN1_6.1(A<0>) D1_6.4(ESD3) PX4_6.1(A)
UNNAMED_1_CAPN4I_I10_A_7: CN1_7.1(A<0>) D1_7.4(ESD3) PX4_7.1(A)
UNNAMED_1_CAPN4I_I10_A_8: CN1_8.1(A<0>) D1_8.4(ESD3) PX4_8.1(A)
UNNAMED_1_CAPN4I_I10_A_9: CN1_9.1(A<0>) D1_9.4(ESD3) PX4_9.1(A)
UNNAMED_1_CAPN4I_I10_A_10: CN1_10.1(A<0>) D1_10.4(ESD3) PX4_10.1(A)
UNNAMED_1_CAPN4I_I10_A_11: CN1_11.1(A<0>) D1_11.4(ESD3) PX4_11.1(A)
UNNAMED_1_CAPN4I_I10_A_12: CN1_12.1(A<0>) D1_12.4(ESD3) PX4_12.1(A)
UNNAMED_1_CAPN4I_I10_A_13: CN1_13.1(A<0>) D1_13.4(ESD3) PX4_13.1(A)
UNNAMED_1_CAPN4I_I10_A_14: CN1_14.1(A<0>) D1_14.4(ESD3) PX4_14.1(A)
UNNAMED_1_CAPN4I_I10_A_15: CN1_15.1(A<0>) D1_15.4(ESD3) PX4_15.1(A)
UNNAMED_1_CAPN4I_I10_A_16: CN1_16.1(A<0>) D1_16.4(ESD3) PX4_16.1(A)

## Via types
v1: diameter 0.61, hole 0.33, TOP to BOTTOM, 32 vias

## Routing (per net, layer and track width the routed paths; a pad name or vN(x,y) marks a point on that pad's centre or on a via; arc(x,y) is an arc through that point)
GND_SIGNAL: length 32
  TOP w0.3: D1_4.5 78.41,27 78.16,26.75 v1(78,26.75) ; v1(82,133.25) 81.84,133.25 81.59,133 D1_14.5 ; v1(122,133.25) 121.84,133.25 121.59,133 D1_12.5 ; D1_13.5 81.59,173 81.84,173.25 v1(82,173.25) ; D1_7.5 163,78.41 163.25,78.16 v1(163.25,78) ; D1_7.2 163,81.8 163.2,82 v1(163.2,82.01) ; v1(38,36.75) 38.16,36.75 38.41,37 D1_2.5 ; v1(36.8,117.99) 36.8,118 37,118.2 D1_15.2 ; v1(82.01,26.8) 82,26.8 81.8,27 D1_4.2 ; D1_16.5 41.59,163 41.84,163.25 v1(42,163.25) ; v1(163.2,122.01) 163.2,122 163,121.8 D1_9.2 ; D1_16.2 38.2,163 38,163.2 v1(37.99,163.2) ; D1_10.5 161.59,163 161.84,163.25 v1(162,163.25) ; v1(77.99,133.2) 78,133.2 78.2,133 D1_14.2 ; D1_11.2 118.2,173 118,173.2 v1(117.99,173.2) ; v1(157.99,163.2) 158,163.2 158.2,163 D1_10.2 ; v1(158,36.75) 158.16,36.75 158.41,37 D1_8.5 ; D1_6.2 121.8,67 122,66.8 v1(122.01,66.8) ; v1(162.01,36.8) 162,36.8 161.8,37 D1_8.2 ; D1_2.2 41.8,37 42,36.8 v1(42.01,36.8) ; D1_6.5 118.41,67 118.16,66.75 v1(118,66.75) ; D1_12.2 118.2,133 118,133.2 v1(117.99,133.2) ; v1(36.8,77.99) 36.8,78 37,78.2 D1_1.2 ; D1_5.5 118.41,27 118.16,26.75 v1(118,26.75) ; v1(36.75,82) 36.75,81.84 37,81.59 D1_1.5 ; D1_9.5 163,118.41 163.25,118.16 v1(163.25,118) ; D1_3.2 81.8,67 82,66.8 v1(82.01,66.8) ; D1_11.5 121.59,173 121.84,173.25 v1(122,173.25) ; D1_5.2 121.8,27 122,26.8 v1(122.01,26.8) ; v1(78,66.75) 78.16,66.75 78.41,67 D1_3.5 ; v1(77.99,173.2) 78,173.2 78.2,173 D1_13.2 ; v1(36.75,122) 36.75,121.84 37,121.59 D1_15.5
UNNAMED_1_CAPN4I_I10_A_1: length 20.6
  TOP w0.226: PX4_1.1 49.99,90.01
  TOP w0.26: 38.8,81.2 38.7,81.1 D1_1.4 37.65,84.25
  TOP w0.4: 37.65,84.25 43.41,90.01 49.99,90.01 ; CN1_1.1 38.8,81.2
UNNAMED_1_CAPN4I_I10_A_1_1: length 16.9
  TOP w0.226: 36.35,80.65 D1_1.6
  TOP w0.26: 38.85,80.4 38.77,80.31 36.56,80.31 36.35,80.53 36.35,80.65 ; 35.2,81.1 D1_1.6
  TOP w0.4: 29.99,90.01 PX3_1.1 29.99,86.31 35.2,81.1 ; CN1_1.3 38.85,80.4
UNNAMED_1_CAPN4I_I10_A_1_2: length 16.9
  TOP w0.226: 39.35,36.35 D1_2.6
  TOP w0.26: 39.35,36.35 39.47,36.35 39.69,36.56 39.69,38.77 39.6,38.85 ; 38.9,35.2 D1_2.6
  TOP w0.4: 38.9,35.2 33.69,29.99 PX3_2.1 29.99,29.99 ; CN1_2.3 39.6,38.85
UNNAMED_1_CAPN4I_I10_A_1_3: length 16.9
  TOP w0.226: 79.35,66.35 D1_3.6
  TOP w0.26: 78.9,65.2 D1_3.6 ; 79.6,68.86 79.69,68.77 79.69,66.56 79.47,66.35 79.35,66.35
  TOP w0.4: 69.99,59.99 PX3_3.1 73.69,59.99 78.9,65.2 ; CN1_3.3 79.6,68.86
UNNAMED_1_CAPN4I_I10_A_1_4: length 16.9
  TOP w0.226: 79.35,26.35 D1_4.6
  TOP w0.26: 78.9,25.2 D1_4.6 ; 79.35,26.35 79.47,26.35 79.69,26.56 79.69,28.77 79.6,28.86
  TOP w0.4: 69.99,19.99 PX3_4.1 73.69,19.99 78.9,25.2 ; CN1_4.3 79.6,28.86
UNNAMED_1_CAPN4I_I10_A_1_5: length 16.9
  TOP w0.226: 119.35,26.35 D1_5.6
  TOP w0.26: 119.35,26.35 119.47,26.35 119.69,26.56 119.69,28.77 119.6,28.86 ; 118.9,25.2 D1_5.6
  TOP w0.4: 109.99,19.99 PX3_5.1 113.69,19.99 118.9,25.2 ; CN1_5.3 119.6,28.86
UNNAMED_1_CAPN4I_I10_A_1_6: length 16.9
  TOP w0.226: 119.35,66.35 D1_6.6
  TOP w0.26: 119.6,68.86 119.69,68.77 119.69,66.56 119.47,66.35 119.35,66.35 ; 118.9,65.2 D1_6.6
  TOP w0.4: CN1_6.3 119.6,68.86 ; 118.9,65.2 113.69,59.99 PX3_6.1 109.99,59.99
UNNAMED_1_CAPN4I_I10_A_1_7: length 16.9
  TOP w0.226: 163.65,79.35 D1_7.6
  TOP w0.26: 161.15,79.6 161.23,79.69 163.44,79.69 163.65,79.47 163.65,79.35 ; 164.8,78.9 D1_7.6
  TOP w0.4: 170.01,69.99 PX3_7.1 170.01,73.69 164.8,78.9 ; CN1_7.3 161.15,79.6
UNNAMED_1_CAPN4I_I10_A_1_8: length 16.9
  TOP w0.226: 159.35,36.35 D1_8.6
  TOP w0.26: 159.35,36.35 159.47,36.35 159.69,36.56 159.69,38.77 159.6,38.85 ; 158.9,35.2 D1_8.6
  TOP w0.4: 158.9,35.2 153.69,29.99 PX3_8.1 149.99,29.99 ; CN1_8.3 159.6,38.85
UNNAMED_1_CAPN4I_I10_A_1_9: length 16.9
  TOP w0.226: 163.65,119.35 D1_9.6
  TOP w0.26: 163.65,119.35 163.65,119.47 163.44,119.69 161.23,119.69 161.15,119.6 ; 164.8,118.9 D1_9.6
  TOP w0.4: 170.01,109.99 PX3_9.1 170.01,113.69 164.8,118.9 ; CN1_9.3 161.15,119.6
UNNAMED_1_CAPN4I_I10_A_1_10: length 16.9
  TOP w0.226: 160.65,163.65 D1_10.6
  TOP w0.26: 160.65,163.65 160.53,163.65 160.31,163.44 160.31,161.23 160.4,161.15 ; 161.1,164.8 D1_10.6
  TOP w0.4: CN1_10.3 160.4,161.15 ; 170.01,170.01 PX3_10.1 166.31,170.01 161.1,164.8
UNNAMED_1_CAPN4I_I10_A_1_11: length 16.9
  TOP w0.226: 120.65,173.65 D1_11.6
  TOP w0.26: 120.4,171.14 120.31,171.23 120.31,173.44 120.53,173.65 120.65,173.65 ; 121.1,174.8 D1_11.6
  TOP w0.4: 130.01,180.01 PX3_11.1 126.31,180.01 121.1,174.8 ; CN1_11.3 120.4,171.14
UNNAMED_1_CAPN4I_I10_A_1_12: length 16.9
  TOP w0.226: 120.65,133.65 D1_12.6
  TOP w0.26: 120.4,131.15 120.31,131.23 120.31,133.44 120.53,133.65 120.65,133.65 ; 121.1,134.8 D1_12.6
  TOP w0.4: CN1_12.3 120.4,131.15 ; 130.01,140.01 PX3_12.1 126.31,140.01 121.1,134.8
UNNAMED_1_CAPN4I_I10_A_1_13: length 16.9
  TOP w0.226: 80.65,173.65 D1_13.6
  TOP w0.26: 80.65,173.65 80.53,173.65 80.31,173.44 80.31,171.23 80.4,171.14 ; 81.1,174.8 D1_13.6
  TOP w0.4: 81.1,174.8 86.31,180.01 PX3_13.1 90.01,180.01 ; CN1_13.3 80.4,171.14
UNNAMED_1_CAPN4I_I10_A_1_14: length 16.9
  TOP w0.226: 80.65,133.65 D1_14.6
  TOP w0.26: 81.1,134.8 D1_14.6 ; 80.65,133.65 80.53,133.65 80.31,133.44 80.31,131.23 80.4,131.15
  TOP w0.4: 90.01,140.01 PX3_14.1 86.31,140.01 81.1,134.8 ; CN1_14.3 80.4,131.15
UNNAMED_1_CAPN4I_I10_A_1_15: length 16.9
  TOP w0.226: 36.35,120.65 D1_15.6
  TOP w0.26: 35.2,121.1 D1_15.6 ; 38.85,120.4 38.77,120.31 36.56,120.31 36.35,120.53 36.35,120.65
  TOP w0.4: 29.99,130.01 PX3_15.1 29.99,126.31 35.2,121.1 ; CN1_15.3 38.85,120.4
UNNAMED_1_CAPN4I_I10_A_1_16: length 16.9
  TOP w0.226: 40.65,163.65 D1_16.6
  TOP w0.26: 40.4,161.15 40.31,161.23 40.31,163.44 40.53,163.65 40.65,163.65 ; 41.1,164.8 D1_16.6
  TOP w0.4: 41.1,164.8 46.31,170.01 PX3_16.1 50.01,170.01 ; CN1_16.3 40.4,161.15
UNNAMED_1_CAPN4I_I10_A_2: length 20.6
  TOP w0.226: PX4_2.1 29.99,49.99
  TOP w0.26: 35.75,37.65 D1_2.4 38.9,38.7 38.8,38.8
  TOP w0.4: 29.99,49.99 29.99,43.41 35.75,37.65 ; CN1_2.1 38.8,38.8
UNNAMED_1_CAPN4I_I10_A_2_1: length 16.8
  TOP w0.226: PX2_1.1 29.99,70.01 ; D1_1.1 36.35,79.45 36.57,79.67 38.83,79.67
  TOP w0.26: 35.2,78.9 D1_1.1
  TOP w0.4: CN1_1.5 38.9,79.6 38.83,79.67 ; 29.99,70.01 29.99,73.69 35.2,78.9
UNNAMED_1_CAPN4I_I10_A_2_2: length 16.8
  TOP w0.226: D1_2.1 40.55,36.35 40.33,36.57 40.33,38.83 ; PX2_2.1 49.99,29.99
  TOP w0.26: 41.1,35.2 D1_2.1
  TOP w0.4: 40.33,38.83 40.4,38.9 CN1_2.5 ; 49.99,29.99 46.31,29.99 41.1,35.2
UNNAMED_1_CAPN4I_I10_A_2_3: length 16.8
  TOP w0.226: PX2_3.1 89.99,59.99 ; D1_3.1 80.55,66.35 80.33,66.57 80.33,68.83
  TOP w0.26: 81.1,65.2 D1_3.1
  TOP w0.4: 80.33,68.83 80.4,68.9 CN1_3.5 ; 89.99,59.99 86.31,59.99 81.1,65.2
UNNAMED_1_CAPN4I_I10_A_2_4: length 16.8
  TOP w0.226: 80.33,28.83 80.33,26.57 80.55,26.35 D1_4.1 ; PX2_4.1 89.99,19.99
  TOP w0.26: 81.1,25.2 D1_4.1
  TOP w0.4: 89.99,19.99 86.31,19.99 81.1,25.2 ; 80.33,28.83 80.4,28.9 CN1_4.5
UNNAMED_1_CAPN4I_I10_A_2_5: length 16.8
  TOP w0.226: PX2_5.1 129.99,19.99 ; D1_5.1 120.55,26.35 120.33,26.57 120.33,28.83
  TOP w0.26: 121.1,25.2 D1_5.1
  TOP w0.4: 129.99,19.99 126.31,19.99 121.1,25.2 ; CN1_5.5 120.4,28.9 120.33,28.83
UNNAMED_1_CAPN4I_I10_A_2_6: length 16.8
  TOP w0.226: D1_6.1 120.55,66.35 120.33,66.57 120.33,68.83 ; PX2_6.1 129.99,59.99
  TOP w0.26: 121.1,65.2 D1_6.1
  TOP w0.4: CN1_6.5 120.4,68.9 120.33,68.83 ; 121.1,65.2 126.31,59.99 129.99,59.99
UNNAMED_1_CAPN4I_I10_A_2_7: length 16.8
  TOP w0.226: PX2_7.1 170.01,89.99 ; D1_7.1 163.65,80.55 163.43,80.33 161.17,80.33
  TOP w0.26: 164.8,81.1 D1_7.1
  TOP w0.4: 170.01,89.99 170.01,86.31 164.8,81.1 ; CN1_7.5 161.1,80.4 161.17,80.33
UNNAMED_1_CAPN4I_I10_A_2_8: length 16.8
  TOP w0.226: 160.33,38.83 160.33,36.57 160.55,36.35 D1_8.1 ; PX2_8.1 169.99,29.99
  TOP w0.26: 161.1,35.2 D1_8.1
  TOP w0.4: CN1_8.5 160.4,38.9 160.33,38.83 ; 161.1,35.2 166.31,29.99 169.99,29.99
UNNAMED_1_CAPN4I_I10_A_2_9: length 16.8
  TOP w0.226: 161.17,120.33 163.43,120.33 163.65,120.55 D1_9.1 ; PX2_9.1 170.01,129.99
  TOP w0.26: 164.8,121.1 D1_9.1
  TOP w0.4: CN1_9.5 161.1,120.4 161.17,120.33 ; 164.8,121.1 170.01,126.31 170.01,129.99
UNNAMED_1_CAPN4I_I10_A_2_10: length 16.8
  TOP w0.226: D1_10.1 159.45,163.65 159.67,163.43 159.67,161.17 ; PX2_10.1 150.01,170.01
  TOP w0.26: 158.9,164.8 D1_10.1
  TOP w0.4: 159.67,161.17 159.6,161.1 CN1_10.5 ; 150.01,170.01 153.69,170.01 158.9,164.8
UNNAMED_1_CAPN4I_I10_A_2_11: length 16.8
  TOP w0.226: 119.67,171.17 119.67,173.43 119.45,173.65 D1_11.1 ; PX2_11.1 110.01,180.01
  TOP w0.26: 118.9,174.8 D1_11.1
  TOP w0.4: CN1_11.5 119.6,171.1 119.67,171.17 ; 110.01,180.01 113.69,180.01 118.9,174.8
UNNAMED_1_CAPN4I_I10_A_2_12: length 16.8
  TOP w0.226: PX2_12.1 110.01,140.01 ; D1_12.1 119.45,133.65 119.67,133.43 119.67,131.17
  TOP w0.26: 118.9,134.8 D1_12.1
  TOP w0.4: 110.01,140.01 113.69,140.01 118.9,134.8 ; CN1_12.5 119.6,131.1 119.67,131.17
UNNAMED_1_CAPN4I_I10_A_2_13: length 16.8
  TOP w0.226: PX2_13.1 70.01,180.01 ; D1_13.1 79.45,173.65 79.67,173.43 79.67,171.17
  TOP w0.26: 78.9,174.8 D1_13.1
  TOP w0.4: 70.01,180.01 73.69,180.01 78.9,174.8 ; 79.67,171.17 79.6,171.1 CN1_13.5
UNNAMED_1_CAPN4I_I10_A_2_14: length 16.8
  TOP w0.226: PX2_14.1 70.01,140.01 ; 79.67,131.17 79.67,133.43 79.45,133.65 D1_14.1
  TOP w0.26: 78.9,134.8 D1_14.1
  TOP w0.4: 78.9,134.8 73.69,140.01 70.01,140.01 ; CN1_14.5 79.6,131.1 79.67,131.17
UNNAMED_1_CAPN4I_I10_A_2_15: length 16.8
  TOP w0.226: PX2_15.1 29.99,110.01 ; D1_15.1 36.35,119.45 36.57,119.67 38.83,119.67
  TOP w0.26: 35.2,118.9 D1_15.1
  TOP w0.4: 29.99,110.01 29.99,113.69 35.2,118.9 ; CN1_15.5 38.9,119.6 38.83,119.67
UNNAMED_1_CAPN4I_I10_A_2_16: length 16.8
  TOP w0.226: 39.67,161.17 39.67,163.43 39.45,163.65 D1_16.1 ; PX2_16.1 30.01,170.01
  TOP w0.26: 38.9,164.8 D1_16.1
  TOP w0.4: 39.67,161.17 39.6,161.1 CN1_16.5 ; 38.9,164.8 33.69,170.01 30.01,170.01
UNNAMED_1_CAPN4I_I10_A_3: length 20.6
  TOP w0.226: PX4_3.1 69.99,79.99
  TOP w0.26: 75.75,67.65 D1_3.4 78.9,68.7 78.8,68.8
  TOP w0.4: 69.99,79.99 69.99,73.41 75.75,67.65 ; CN1_3.1 78.8,68.8
UNNAMED_1_CAPN4I_I10_A_3_1: length 20.7
  TOP w0.226: PX1_1.1 49.99,70.01
  TOP w0.26: 37.65,75.55 D1_1.3 38.6,78.9 38.7,78.8
  TOP w0.4: CN1_1.7 38.7,78.8 ; 49.99,70.01 43.19,70.01 37.65,75.55
UNNAMED_1_CAPN4I_I10_A_3_2: length 20.7
  TOP w0.226: PX1_2.1 49.99,49.99
  TOP w0.26: 41.2,38.7 41.1,38.6 D1_2.3 44.45,37.65
  TOP w0.4: 49.99,49.99 49.99,43.19 44.45,37.65 ; CN1_2.7 41.2,38.7
UNNAMED_1_CAPN4I_I10_A_3_3: length 20.7
  TOP w0.226: PX1_3.1 89.99,79.99
  TOP w0.26: 81.2,68.7 81.1,68.6 D1_3.3 84.45,67.65
  TOP w0.4: 84.45,67.65 89.99,73.19 89.99,79.99 ; CN1_3.7 81.2,68.7
UNNAMED_1_CAPN4I_I10_A_3_4: length 20.7
  TOP w0.226: PX1_4.1 89.99,39.99
  TOP w0.26: 81.2,28.7 81.1,28.6 D1_4.3 84.45,27.65
  TOP w0.4: CN1_4.7 81.2,28.7 ; 89.99,39.99 89.99,33.19 84.45,27.65
UNNAMED_1_CAPN4I_I10_A_3_5: length 20.7
  TOP w0.226: PX1_5.1 129.99,39.99
  TOP w0.26: 121.2,28.7 121.1,28.6 D1_5.3 124.45,27.65
  TOP w0.4: 129.99,39.99 129.99,33.19 124.45,27.65 ; CN1_5.7 121.2,28.7
UNNAMED_1_CAPN4I_I10_A_3_6: length 20.7
  TOP w0.226: PX1_6.1 129.99,79.99
  TOP w0.26: 124.45,67.65 D1_6.3 121.1,68.6 121.2,68.7
  TOP w0.4: 124.45,67.65 129.99,73.19 129.99,79.99 ; CN1_6.7 121.2,68.7
UNNAMED_1_CAPN4I_I10_A_3_7: length 20.7
  TOP w0.226: PX1_7.1 150.01,89.99
  TOP w0.26: 161.3,81.2 161.4,81.1 D1_7.3 162.35,84.45
  TOP w0.4: CN1_7.7 161.3,81.2 ; 150.01,89.99 156.81,89.99 162.35,84.45
UNNAMED_1_CAPN4I_I10_A_3_8: length 20.7
  TOP w0.226: PX1_8.1 169.99,49.99
  TOP w0.26: 161.2,38.7 161.1,38.6 D1_8.3 164.45,37.65
  TOP w0.4: 164.45,37.65 169.99,43.19 169.99,49.99 ; CN1_8.7 161.2,38.7
UNNAMED_1_CAPN4I_I10_A_3_9: length 20.7
  TOP w0.226: PX1_9.1 150.01,129.99
  TOP w0.26: 161.3,121.2 161.4,121.1 D1_9.3 162.35,124.45
  TOP w0.4: 150.01,129.99 156.81,129.99 162.35,124.45 ; CN1_9.7 161.3,121.2
UNNAMED_1_CAPN4I_I10_A_3_10: length 20.7
  TOP w0.226: PX1_10.1 150.01,150.01
  TOP w0.26: 158.8,161.3 158.9,161.4 D1_10.3 155.55,162.35
  TOP w0.4: CN1_10.7 158.8,161.3 ; 150.01,150.01 150.01,156.81 155.55,162.35
UNNAMED_1_CAPN4I_I10_A_3_11: length 20.7
  TOP w0.226: PX1_11.1 110.01,160.01
  TOP w0.26: 118.8,171.3 118.9,171.4 D1_11.3 115.55,172.35
  TOP w0.4: 110.01,160.01 110.01,166.81 115.55,172.35 ; CN1_11.7 118.8,171.3
UNNAMED_1_CAPN4I_I10_A_3_12: length 20.7
  TOP w0.226: PX1_12.1 110.01,120.01
  TOP w0.26: 118.8,131.3 118.9,131.4 D1_12.3 115.55,132.35
  TOP w0.4: 110.01,120.01 110.01,126.81 115.55,132.35 ; CN1_12.7 118.8,131.3
UNNAMED_1_CAPN4I_I10_A_3_13: length 20.7
  TOP w0.226: PX1_13.1 70.01,160.01
  TOP w0.26: 78.8,171.3 78.9,171.4 D1_13.3 75.55,172.35
  TOP w0.4: 75.55,172.35 70.01,166.81 70.01,160.01 ; CN1_13.7 78.8,171.3
UNNAMED_1_CAPN4I_I10_A_3_14: length 20.7
  TOP w0.226: PX1_14.1 70.01,120.01
  TOP w0.26: 78.8,131.3 78.9,131.4 D1_14.3 75.55,132.35
  TOP w0.4: 75.55,132.35 70.01,126.81 70.01,120.01 ; CN1_14.7 78.8,131.3
UNNAMED_1_CAPN4I_I10_A_3_15: length 20.7
  TOP w0.226: PX1_15.1 49.99,110.01
  TOP w0.26: 37.65,115.55 D1_15.3 38.6,118.9 38.7,118.8
  TOP w0.4: CN1_15.7 38.7,118.8 ; 37.65,115.55 43.19,110.01 49.99,110.01
UNNAMED_1_CAPN4I_I10_A_3_16: length 20.7
  TOP w0.226: PX1_16.1 30.01,150.01
  TOP w0.26: 35.55,162.35 D1_16.3 38.9,161.4 38.8,161.3
  TOP w0.4: 35.55,162.35 30.01,156.81 30.01,150.01 ; CN1_16.7 38.8,161.3
UNNAMED_1_CAPN4I_I10_A_4: length 20.6
  TOP w0.226: PX4_4.1 69.99,39.99
  TOP w0.26: 75.75,27.65 D1_4.4 78.9,28.7 78.8,28.8
  TOP w0.4: 75.75,27.65 69.99,33.41 69.99,39.99 ; CN1_4.1 78.8,28.8
UNNAMED_1_CAPN4I_I10_A_5: length 20.6
  TOP w0.226: PX4_5.1 109.99,39.99
  TOP w0.26: 118.8,28.8 118.9,28.7 D1_5.4 115.75,27.65
  TOP w0.4: 109.99,39.99 109.99,33.41 115.75,27.65 ; CN1_5.1 118.8,28.8
UNNAMED_1_CAPN4I_I10_A_6: length 20.6
  TOP w0.226: PX4_6.1 109.99,79.99
  TOP w0.26: 118.8,68.8 118.9,68.7 D1_6.4 115.75,67.65
  TOP w0.4: 115.75,67.65 109.99,73.41 109.99,79.99 ; CN1_6.1 118.8,68.8
UNNAMED_1_CAPN4I_I10_A_7: length 20.6
  TOP w0.226: PX4_7.1 150.01,69.99
  TOP w0.26: 162.35,75.75 D1_7.4 161.3,78.9 161.2,78.8
  TOP w0.4: CN1_7.1 161.2,78.8 ; 162.35,75.75 156.59,69.99 150.01,69.99
UNNAMED_1_CAPN4I_I10_A_8: length 20.6
  TOP w0.226: PX4_8.1 149.99,49.99
  TOP w0.26: 155.75,37.65 D1_8.4 158.9,38.7 158.8,38.8
  TOP w0.4: CN1_8.1 158.8,38.8 ; 149.99,49.99 149.99,43.41 155.75,37.65
UNNAMED_1_CAPN4I_I10_A_9: length 20.6
  TOP w0.226: PX4_9.1 150.01,109.99
  TOP w0.26: 161.2,118.8 161.3,118.9 D1_9.4 162.35,115.75
  TOP w0.4: 150.01,109.99 156.59,109.99 162.35,115.75 ; CN1_9.1 161.2,118.8
UNNAMED_1_CAPN4I_I10_A_10: length 20.6
  TOP w0.226: PX4_10.1 170.01,150.01
  TOP w0.26: 164.25,162.35 D1_10.4 161.1,161.3 161.2,161.2
  TOP w0.4: CN1_10.1 161.2,161.2 ; 164.25,162.35 170.01,156.59 170.01,150.01
UNNAMED_1_CAPN4I_I10_A_11: length 20.6
  TOP w0.226: PX4_11.1 130.01,160.01
  TOP w0.26: 124.25,172.35 D1_11.4 121.1,171.3 121.2,171.2
  TOP w0.4: 130.01,160.01 130.01,166.59 124.25,172.35 ; CN1_11.1 121.2,171.2
UNNAMED_1_CAPN4I_I10_A_12: length 20.6
  TOP w0.226: PX4_12.1 130.01,120.01
  TOP w0.26: 121.2,131.2 121.1,131.3 D1_12.4 124.25,132.35
  TOP w0.4: 124.25,132.35 130.01,126.59 130.01,120.01 ; CN1_12.1 121.2,131.2
UNNAMED_1_CAPN4I_I10_A_13: length 20.6
  TOP w0.226: PX4_13.1 90.01,160.01
  TOP w0.26: 81.2,171.2 81.1,171.3 D1_13.4 84.25,172.35
  TOP w0.4: 90.01,160.01 90.01,166.59 84.25,172.35 ; CN1_13.1 81.2,171.2
UNNAMED_1_CAPN4I_I10_A_14: length 20.6
  TOP w0.226: PX4_14.1 90.01,120.01
  TOP w0.26: 81.2,131.2 81.1,131.3 D1_14.4 84.25,132.35
  TOP w0.4: 90.01,120.01 90.01,126.59 84.25,132.35 ; CN1_14.1 81.2,131.2
UNNAMED_1_CAPN4I_I10_A_15: length 20.6
  TOP w0.226: PX4_15.1 49.99,130.01
  TOP w0.26: 37.65,124.25 D1_15.4 38.7,121.1 38.8,121.2
  TOP w0.4: CN1_15.1 38.8,121.2 ; 49.99,130.01 43.41,130.01 37.65,124.25
UNNAMED_1_CAPN4I_I10_A_16: length 20.6
  TOP w0.226: PX4_16.1 50.01,150.01
  TOP w0.26: 44.25,162.35 D1_16.4 41.1,161.3 41.2,161.2
  TOP w0.4: 50.01,150.01 50.01,156.59 44.25,162.35 ; CN1_16.1 41.2,161.2

## Text on the board
User.Comments: pc049a_lemo_db - daughter-board for single maroc readout | 17/Mar/14 | D.Cussans | 14
